# Altium PCB pix v2.4.8.PcbDoc (part 3 of 3)
Units mil, origin at the board's own origin, x right, y up, seen from the top; angles counter-clockwise.
Board outline 2756 x 1595 mil, 4 copper layers (Top, MidLayer1, MidLayer2, Bottom), stack 50.397 mil thick; 154 components, 289 nets, 731 pads, 438 vias.
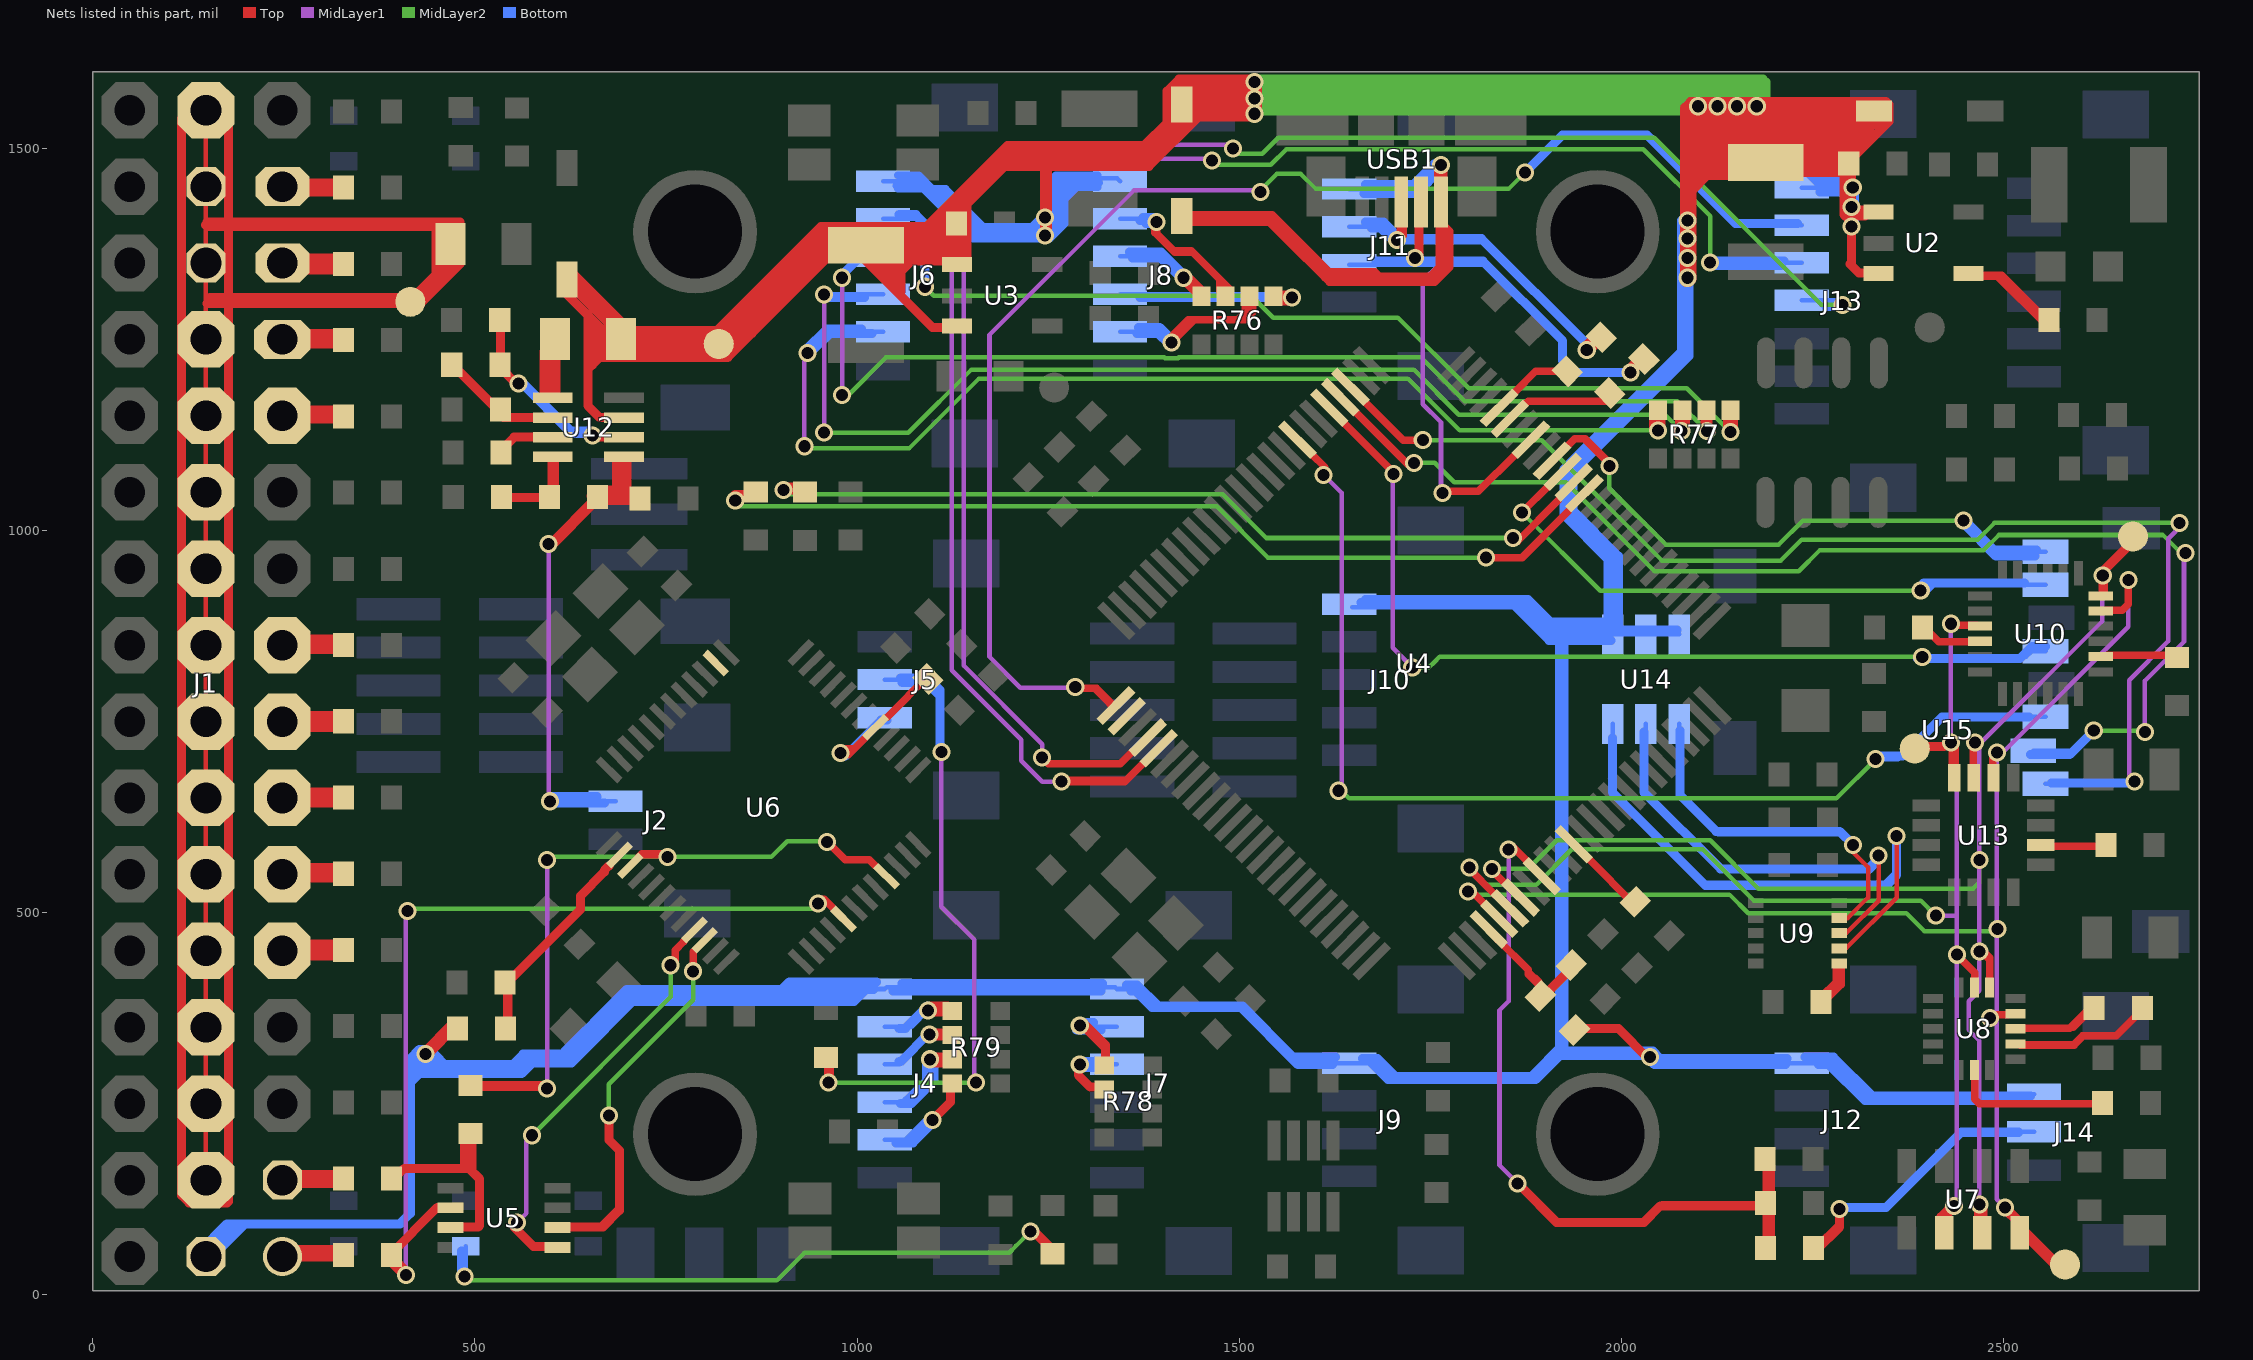
[diagram p5: the nets of this part, all layers, seen from the top]

## Via types
v1: diameter 23.62, hole 15.75, Top to Bottom, 438 vias

## Nets (pads, with @x,y where several pads share a name; then routed paths per layer and width w, separated by ;. In a path a pad name is that pad's centre, name@x,y a point inside that pad or via, vN(x,y) a via of type N, cw(c..) or ccw(c..) an arc to the next point about the centre after c; other vN are vias at no path point) (continued)
N$38: R33.1 R34.2 U5.3 | length 559.1
  Top w5.91: R33.1@390.83,151.84 402.37,163.39 490.16,163.39 ; U5.3@467.87,87.91 503.26,87.91 505.91,90.55 505.91,147.64 490.16,163.39 ; R34.2@490.16,206.93 490.16,163.39
  Top w11.81: R33.1@391.73,153.54 395.67,153.54 407.48,165.35 492.13,165.35 505.91,151.57 505.91,90.55 503.94,88.58 U5.3@478.35,88.58 ; 486.22,173.23 R34.2@486.22,202.76 ; 496.06,163.39 R34.2@496.06,212.6
N$39: 
N$40: LED3.C R9.1 | length 936.6
  Top w5.91: v1(1226.65,82.68) R9.1@1255.75,53.58
  Top w11.81: v1@1222.44,84.65 1230.31,84.65 R9.1@1261.81,53.15
  MidLayer2 w5.91: v1(486.22,23.62) 491.14,18.7 894.68,18.7 931.1,55.12 1199.09,55.12 1207.81,63.84 v1(1226.65,82.68)
  Bottom w5.91: v1(486.22,23.62) 488,25.4 LED3.C@488,63.47
  Bottom w11.81: v1@482.28,23.62 LED3.C@482.28,57.09
N$41: 
N$42: 
N$43: 
N$44: 
N$45: 
N$46: 
N$47: 
N$48: 
N$49: 
N$50: 
N$51: 
N$52: 
N$53: 
N$54: 
N$55: 
N$56: 
N$57: J5.2 R52.2 | length 1057.6
  Top w5.91: R52.2@959.49,310.3 959.49,280.67 v1(962.6,277.56)
  Top w9.84: v1@964.57,277.56 R52.2@964.57,301.18
  MidLayer1 w5.91: v1(1110.24,709.88) 1110.24,507.87 1153.54,464.57 1153.54,305.12 1153.54,275.59 v1(1155.51,277.56)
  MidLayer2 w5.91: v1(962.6,277.56) v1(1155.51,277.56)
  Bottom w5.91: J5.2@1036,805 1090.67,805 1110.24,785.43 v1(1110.24,709.88)
  Bottom w11.81: J5.2@1057.09,807.09 1092.52,807.09 1108.27,791.34 v1@1108.27,708.66 ; J5.2@1059.06,801.18 1090.55,801.18 1106.3,785.43
N$58: 
N$59: 
N$60: 
N$61: 
N$62: 
N$63: 
N$64: 
N$65: 
N$66: 
N$67: 
N$68: J1.34 R3.2 | length 173.7
  Top w5.91: J1.34@248.63,1149.37 R3.2@327.83,1149.37
  Top w11.81: J1.34@271.65,1145.67 R3.2@320.87,1145.67 ; J1.34@271.65,1157.48 R3.2@316.93,1157.48
N$69: 
N$70: 
N$71: J1.13 R40.2 | length 194.9
  Top w5.91: J1.13@249.1,451.1 R40.2@327.83,451.1
  Top w11.81: J1.13@257.87,458.66 R40.2@316.93,458.66 ; J1.13@265.75,442.91 R40.2@322.83,442.91
N$72: J1.16 R39.2 | length 171.5
  Top w5.91: J1.16@248.85,550.85 R39.2@327.83,550.85
  Top w11.81: J1.16@265.75,545.28 R39.2@318.9,545.28 ; J1.16@279.53,559.06 R39.2@318.9,559.06
N$73: J1.19 R36.2 | length 179.6
  Top w5.91: J1.19@248.61,650.61 R36.2@327.83,650.61
  Top w11.81: J1.19@273.62,643.7 R36.2@328.74,643.7 ; J1.19@273.62,657.48 R36.2@318.9,657.48
N$74: J1.22 R35.2 | length 187.7
  Top w5.91: J1.22@248.36,750.36 R35.2@327.83,750.36
  Top w11.81: J1.22@261.81,757.87 R35.2@318.9,757.87 ; J1.22@275.59,742.13 R35.2@326.77,742.13
N$75: J1.25 R48.2 | length 178.3
  Top w5.91: J1.25@248,850 248.11,850.11 R48.2@327.83,850.11
  Top w11.81: J1.25@271.65,858.27 R48.2@320.87,858.27 ; J1.25@281.5,844.49 R48.2@330.71,844.49
N$77: J1.37 R4.2 | length 183.3
  Top w5.91: J1.37@248.87,1249.13 R4.2@327.83,1249.13
  Top w11.81: J1.37@269.68,1257.87 R4.2@320.87,1257.87 ; J1.37@271.65,1244.09 R4.2@324.8,1244.09
N$78: J1.40 R5.2 | length 212.6
  Top w5.91: J1.40@249.12,1348.88 R5.2@327.83,1348.88
  Top w11.81: J1.40@234.25,1356.3 R5.2@320.87,1356.3 ; J1.40@267.72,1340.55 R5.2@314.96,1340.55
N$79: J1.43 R6.2 | length 192.6
  Top w5.91: J1.43@249.37,1448.63 R6.2@327.83,1448.63
  Top w11.81: J1.43@257.87,1454.72 R6.2@318.9,1454.72 ; J1.43@271.65,1442.91 R6.2@324.8,1442.91
N$80: 
N$81: 
N$82: 
N$83: 
N$84: 
N$85: 
N$86: 
N$87: 
N$88: 
N$89: 
N$90: 
N$91: 
N$92: 
N$93: 
N$94: 
N$95: 
N$96: 
N$97: 
N$98: 
N$99: J1.4 R33.2 | length 196.7
  Top w5.91: J1.4@248,150 325.99,150 R33.2@327.83,151.84
  Top w11.81: J1.4@261.81,157.48 R33.2@316.93,157.48 ; J1.4@263.78,145.67 R33.2@324.8,145.67
N$100: 
N$101: 
N$102: 
N$103: 
N$104: 
N$105: 
N$106: 
N$107: 
N$109: 
N$110: 
N$113: 
N$115: 
NewNet1: C36.2 J2.1 R62.2 U12.1 | length 1175.3
  Top w5.91: v1(596.46,982.28) 599.13,982.28 R62.2@660.51,1043.66 662.48,1041.69 C36.2@715.63,1041.69 ; 694.88,1043.17 694.95,1043.24 U12.1@694.95,1096.32
  Top w11.81: v1@596.46,984.25 600.39,984.25 R62.2@657.48,1041.34 ; v1@600.39,980.32 655.51,1035.43 R62.2@663.39,1035.43 ; R62.2@651.57,1045.28 C36.2@702.76,1045.28 ; R62.2@663.39,1039.37 C36.2@704.72,1039.37 ; R62.2@667.32,1053.15 694.88,1053.15 ; 685.04,1041.34 U12.1@685.04,1092.52 ; 694.88,1057.09 U12.1@694.88,1090.55 ; 698.82,1049.21 U12.1@698.82,1094.49
  MidLayer1 w5.91: v1@596.46,643.7 v1(596.46,982.28)
  Bottom w5.91: v1(598.3,645.67) 598.36,645.61 J2.1@684,645.61
  Bottom w11.81: v1@596.46,643.7 J2.1@669.29,643.7 ; v1@600.39,651.57 J2.1@659.45,651.57
NewNet2: C35.2 U10.20 | length 195.1
  Top w5.91: U10.20@2627.01,835.04 2688.97,835.04 ; 2700.71,835.04 2688.97,835.04 ; C35.2@2727.28,834.06 2726.3,835.04 2688.97,835.04
  Top w9.84: U10.20@2635.83,836.61 C35.2@2718.5,836.61
NewNet3: C37.1 U10.10 | length 150.8
  Top w5.91: C37.1@2394.29,872.95 2412.2,855.04 U10.10@2469.27,855.04
  Top w9.84: C37.1@2397.64,872.05 2415.35,854.33 U10.10@2458.66,854.33
NewNet4: C34.2 U13.14 | length 155.8
  Top w5.91: U13.14@2548.9,588.61 C34.2@2633.87,588.61
  Top w9.84: U13.14@2561.02,586.61 C34.2@2631.89,586.61
NewNet5: C29.1 U8.3 | length 215.1
  Top w5.91: U8.3@2515.87,348.03 2591.81,348.03 C29.1@2618.7,374.92
  Top w9.84: U8.3@2521.65,348.43 2586.61,348.43 C29.1@2612.2,374.02
NewNet6: C29.2 U8.2 | length 360.7
  Top w5.91: U8.2@2515.87,328.03 2589.84,328.03 2602.36,340.55 2647.32,340.55 C29.2@2681.69,374.92
  Top w9.84: U8.2@2521.65,326.77 2592.52,326.77 2604.33,338.58 2647.64,338.58 C29.2@2679.13,370.08
NewNet7: C30.1 U8.15 | length 382.7
  Top w5.91: U8.15@2462.6,293.36 2462.6,257.87 2469.41,251.06 C30.1@2617.52,251.06
  Top w9.84: U8.15@2462.6,283.46 2462.6,255.91 2468.5,250 C30.1@2622.05,250
NewNet8: C31.2 R59.1 U12.6 | length 308.2
  Top w5.91: R59.1@469.57,1216.89 474.76,1216.89 543.94,1147.71 U12.6@601.69,1147.71
  Top w11.81: R59.1@464.57,1222.44 C31.2@535.43,1151.57 ; C31.2@537.4,1147.64 U12.6@584.65,1147.64
NewNet9: L1.2 U12.5 | length 233.8
  Top w5.91: U12.5@601.69,1173.71 604.61,1176.62 L1.2@604.61,1250.75
  Top w11.81: U12.5@590.55,1179.13 L1.2@590.55,1234.25 ; 600.39,1183.07 L1.2@600.39,1234.25 ; U12.5@606.3,1177.17 L1.2@606.3,1226.38
NewNet10: 
NewNet11: R57.1 U9.6 | length 162.1
  Top w5.91: R57.1@2261.46,382.95 2285.02,406.52 U9.6@2285.02,433.22
  Top w9.84: R57.1@2261.81,389.76 2281.5,409.45 U9.6@2281.5,431.1 ; R57.1@2269.68,387.8 2287.4,405.51 U9.6@2287.4,433.07
NewNet12: R59.2 R60.1 U12.2 | length 487.9
  Top w5.91: R59.2@532.4,1217.05 R60.1@532.4,1275.24 ; R59.2@532.56,1216.89 v1(557.09,1192.36) ; v1(653.54,1124.02) 692.85,1124.02 U12.2@694.95,1121.91
  Top w11.81: R60.1@533.46,1271.65 533.46,1212.6 v1@553.15,1192.91 ; v1@655.51,1122.05 U12.2@671.26,1122.05
  Bottom w5.91: v1(557.09,1192.36) 625.43,1124.02 v1(653.54,1124.02)
  Bottom w11.81: v1@553.15,1194.88 561.02,1194.88 625.98,1129.92 v1@651.57,1129.92
NewNet13: R16.2 U12.7 | length 137.2
  Top w5.91: R16.2@533.94,1102.24 553.61,1121.91 U12.7@601.69,1121.91
  Top w11.81: R16.2@531.5,1102.36 551.18,1122.05 U12.7@584.65,1122.05
NewNet14: R61.2 R62.1 U12.8 | length 207.9
  Top w5.91: R61.2@534.53,1043.66 R62.1@597.52,1043.66 597.52,1092.15 U12.8@601.69,1096.32
  Top w11.81: R61.2@537.4,1043.31 R62.1@588.58,1043.31 ; R62.1@604.33,1055.12 U12.8@604.33,1094.49
NewNet15: U9.7 U14.C3 | length 1299.9
  Top w5.91: U9.7@2285.02,453.22 2294.05,453.22 2360.24,519.41 v1(2360.24,600.39)
  Bottom w5.91: U14.C3@1988.69,746.93 1988.69,656.98 2106.3,539.37 2344.49,539.37 2360.24,555.12 v1(2360.24,600.39)
  Bottom w11.81: U14.C3@1988.19,728.35 1988.19,657.48 2110.24,535.43 2346.46,535.43 2360.24,549.21 v1@2360.24,604.33
NewNet16: U9.8 U14.C2 | length 1004.7
  Top w5.91: U9.8@2285.02,473.22 2294.37,473.22 2336.61,515.47 v1(2336.61,574.8)
  Bottom w5.91: U14.C2@2032,746.93 2032,655.01 2126.97,560.04 2321.85,560.04 v1(2336.61,574.8) v1@2336.61,576.77
  Bottom w11.81: U14.C2@2029.53,736.22 2029.53,657.48 2129.92,557.09 2324.8,557.09 v1@2336.61,568.9
NewNet17: U9.9 U14.C1 | length 812
  Top w5.91: U9.9@2285.02,492.91 2296.06,492.91 2322.83,519.68 2322.83,559.35 2303.15,579.04 v1(2303.15,588.58)
  Bottom w5.91: U14.C1@2076,746.93 2076,652.35 2125.98,602.36 2289.37,602.36 v1(2303.15,588.58)
  Bottom w11.81: U14.C1@2076.77,738.19 2076.77,653.54 2124.02,606.3 2285.43,606.3 v1(2303.15,588.58)
NewNet200: C5.1 U2.4 | length 252.6
  Top w5.91: U2.4@2454.37,1336.02 2498.66,1336.02 C5.1@2559.33,1275.35
  Top w9.84: U2.4@2458.66,1332.68 2492.13,1332.68 C5.1@2555.12,1269.68
OTG_DM1: J11.3 R55.2 USB1.D- | length 1047.6
  Top w5.91: v1@1738,1356.49 USB1.D-@1738,1430 ; v1(2011.81,1206.69) R55.2@2029.53,1224.37
  Top w9.84: v1@1734.25,1358.27 USB1.D-@1734.25,1399.61 ; v1@2007.87,1210.63 2017.72,1220.47 R55.2@2017.72,1224.41 ; v1@2013.78,1206.69 2025.59,1218.5 R55.2@2031.5,1218.5
  Bottom w5.91: J11.3@1644,1348 1718.5,1348 ; v1@1738,1356.49 v1@1729.51,1348 ; v1(2011.81,1206.69) 1944.88,1206.69 1923.23,1228.35 1923.23,1251.97 1827.2,1348 v1@1729.51,1348 ; 1718.5,1348 v1@1729.51,1348 ; 1718.5,1348 v1@1729.51,1348
  Bottom w11.81: J11.3@1679.13,1352.36 1818.9,1352.36 1923.23,1248.03 1923.23,1222.44 1938.98,1206.69 v1@2007.87,1206.69
  other v1: 1730.13,1356.49
OTG_DP1: J11.2 R56.2 USB1.D+ | length 947.9
  Top w5.91: USB1.D+@1712,1430 1712,1376.58 v1@1712.6,1375.98 ; v1(1954.72,1236.22) 1971.19,1252.69 R56.2@1973.65,1252.69
  Top w9.84: v1@1710.63,1379.92 USB1.D+@1710.63,1397.64 ; v1@1710.63,1383.86 USB1.D+@1710.63,1403.54 ; v1@1714.57,1385.83 USB1.D+@1714.57,1397.64 ; v1@1952.76,1238.19 1952.76,1242.13 R56.2@1964.57,1253.94 ; v1(1954.72,1236.22) 1960.63,1236.22 R56.2@1968.5,1244.09
  Bottom w5.91: J11.2@1644,1397.61 1690.98,1397.61 1712.6,1375.98 1713.77,1377.16 1821.66,1377.16 1954.72,1244.09 v1(1954.72,1236.22)
  Bottom w11.81: J11.2@1665.35,1403.54 1688.98,1403.54 v1@1708.66,1383.86 ; J11.2@1673.23,1395.67 1685.04,1395.67 v1@1706.69,1374.02 ; v1@1714.57,1381.89 1816.93,1381.89 1956.69,1242.13 v1@1956.69,1238.19
  other v1: 1706.69,1379.92
OTG_FS_DM: R55.1 U4.70 | length 259
  Top w5.91: U4.70@1854.09,1146.32 1876.59,1168.82 1887.79,1168.82 1973.98,1168.82 R55.1@1984.98,1179.83
  Top w9.84: U4.70@1875.13,1166.47 1877.95,1169.29 R55.1@1988.19,1169.29
OTG_FS_DP: R56.1 U4.71 | length 182.3
  Top w5.91: U4.71@1839.95,1160.46 1887.63,1208.15 R56.1@1929.11,1208.15
  Top w9.84: U4.71@1861.09,1181.6 1888.15,1208.66 R56.1@1923.23,1208.66
PB2-BOOT1: R24.2 U4.37 | length 197.9
  Top w5.91: U4.37@1937.72,589.37 2012.86,514.24 R24.2@2018.24,514.24
  Top w9.84: U4.37@1956.69,570.87 R24.2@2017.72,509.84
PPM-SBUS-PROT: J1.1 R50.2 | length 200.8
  Top w5.91: J1.1@248,50 250.09,52.09 R50.2@327.83,52.09
  Top w11.81: J1.1@259.84,49.21 R50.2@324.8,49.21 ; J1.1@263.78,59.06 R50.2@318.9,59.06
PPM_INPUT: R50.1 U5.2 U6.29 | length 1380.7
  Top w5.91: v1(409.45,25.59) 390.83,44.21 R50.1@390.83,52.09 452.44,113.7 U5.2@467.87,113.7 ; v1(948.82,511.81) 961.99,511.81 967.21,506.58 ; 963.96,509.84 967.21,506.58 ; U6.29@982.33,491.47 967.21,506.58
  Top w9.84: v1@948.82,517.72 956.69,517.72 U6.29@968.5,505.91
  Top w11.81: R50.1@387.8,47.24 387.8,51.18 450.79,114.17 U5.2@456.69,114.17 ; R50.1@391.73,45.28 391.73,41.34 v1@407.48,25.59 ; R50.1@393.7,47.24 411.42,29.53 v1@411.42,25.59
  MidLayer1 w5.91: v1(409.45,25.59) 409.45,500 v1(411.42,501.97)
  MidLayer2 w5.91: v1(411.42,501.97) 414.37,504.92 851.38,504.92 941.93,504.92 v1(948.82,511.81)
PRESSURE_SENS: C11.2 R14.2 R15.2 U4.34 | length 1485.4
  Top w5.91: v1(1852.36,582.68) 1860.9,582.68 U4.34@1895.97,547.61 ; v1(1864.17,145.67) 1915.35,94.49 2027.56,94.49 2052.87,119.8 C11.2@2188.35,119.8 ; R14.2@2187.91,62.1 R15.2@2187.91,177.73
  Top w9.84: v1@1850.39,584.65 1858.93,584.65 U4.34@1875.98,567.59
  Top w11.81: v1@1868.11,149.61 1868.11,141.73 1915.35,94.49 2029.53,94.49 2051.18,116.14 C11.2@2190.94,116.14 ; R14.2@2194.88,62.99 R15.2@2194.88,175.2
  MidLayer1 w5.91: v1(1852.36,582.68) 1852.36,383.86 1840.55,372.05 1840.55,169.29 v1(1864.17,145.67)
PRESSURE_SENS_IN: J14.2 R14.1 | length 697.6
  Top w5.91: R14.1@2251.65,61.35 2285.43,95.13 v1(2285.43,112.2)
  Top w11.81: R14.1@2255.91,59.06 2285.43,88.58 v1(2285.43,112.2)
  Bottom w5.91: v1(2285.43,112.2) 2289.37,116.14 2344.49,116.14 2441.35,213 J14.2@2540,213
  Bottom w11.81: v1@2289.37,114.17 2346.46,114.17 2444.88,212.6 J14.2@2519.68,212.6
RGB_LED_3: 
RGB_LED_4: 
RGB_LED_14: 
RSSI_IN: R34.1 U6.15 U6.33 | length 1120.8
  Top w5.91: R34.1@498.03,269.68 v1(594.49,269.68) ; U6.15@703.1,561.4 715.71,574.01 v1@750.79,574.01 ; v1(960.63,592.52) 984.25,568.9 1016.92,568.9 U6.33@1038.34,547.48
  Top w9.84: U6.15@714.57,572.87 718.47,576.77 v1@751.97,576.77 ; v1@958.66,594.49 984.25,568.9 1015.75,568.9 U6.33@1023.62,561.02
  Top w11.81: R34.1@507.87,273.62 v1@590.55,273.62
  MidLayer1 w5.91: v1(594.49,269.68) v1(594.49,568.9)
  MidLayer2 w5.91: v1(594.49,568.9) 598.43,572.83 v1(751.97,572.83) 887.8,572.83 908.46,593.5 v1@959.65,593.5
SAFETY: J5.3 R54.1 U6.41 | length 448.5
  Top w5.91: v1(978.35,708.66) 990.22,708.66 U6.41@1024.17,742.61 1024.17,742.67 1060.04,778.54 1087.17,805.67 R54.1@1092.24,805.67
  Top w9.84: v1@978.35,706.69 988.19,706.69 U6.41@1011.81,730.32 ; v1@980.32,714.57 994.09,714.57 ; 1039.37,755.91 R54.1@1094.49,811.02
  Bottom w5.91: v1(978.35,708.66) 989.66,708.66 J5.3@1036,755
  Bottom w11.81: v1@976.38,704.72 984.25,704.72 1031.5,751.97 J5.3@1039.37,751.97
SBUS_INPUT: U5.6 U6.22 | length 729.8
  Top w5.91: U5.6@607.76,87.91 660.74,87.91 687.01,114.17 687.01,190.94 675.2,202.76 v1(675.2,234.25) ; v1(785.43,423.23) 785.43,448.72 U6.22@800.61,463.89
  Top w9.84: v1@785.43,425.2 785.43,448.72
  Top w11.81: U5.6@618.11,88.58 667.32,88.58 688.98,110.24 688.98,188.98 675.2,202.76 v1@675.2,232.28
  MidLayer2 w5.91: v1(675.2,234.25) 675.2,275.59 785.43,385.83 v1(785.43,423.23)
  Bottom w5.91: v1@785.43,421.26 v1(785.43,423.23)
SBUS_OUTPUT: U5.5 U6.21 | length 653
  Top w5.91: v1(555.12,94.49) 555.12,82.68 575.89,61.91 U5.5@607.76,61.91 ; v1(755.9,431.1) 759.84,435.04 759.84,449.99 U6.21@787.17,477.32
  Top w9.84: v1@761.81,431.1 761.81,450.79 772.83,461.8
  Top w11.81: v1@551.18,96.46 551.18,88.58 576.77,62.99 U5.5@598.43,62.99
  MidLayer1 w5.91: v1(555.12,94.49) 566.93,106.3 566.93,192.91 566.93,200.79 v1(574.8,208.66)
  MidLayer2 w5.91: v1(574.8,208.66) 755.9,389.76 755.9,393.7 v1(755.9,431.1)
SDIO_CK: U4.80 U15.5 | length 1502.6
  Top w5.91: U4.80@1617.92,1160.46 1700.79,1077.59 1700.79,1074.8 v1(1701.92,1073.67)
  Top w9.84: U4.80@1635.83,1141.73 v1@1700.79,1076.77
  MidLayer1 w5.91: 1700.79,860.24 1700.79,870.08 ; v1(1701.92,1073.67) 1700.79,1074.8 1700.79,933.07 1700.79,870.08 ; v1(1726.38,820.87) 1700.79,846.46 1700.79,870.08
  MidLayer2 w5.91: v1(1726.38,820.87) 1748.33,820.87 1755.07,827.6 1762.11,834.65 1866.14,834.65 v1(2393.7,834.65) v1@2395.67,834.65
  Bottom w5.91: v1(2393.7,834.65) 2529.53,834.65 2536.88,842 U15.5@2555,842
  Bottom w11.81: v1@2387.8,832.68 2521.65,832.68 2537.4,848.43 U15.5@2555.12,848.43
SDIO_CMD: U4.83 U15.3 | length 1709.3
  Top w5.91: U4.83@1576.2,1118.74 1610.24,1084.7 v1(1610.24,1072.83)
  Top w9.84: U4.83@1594.49,1100.39 1612.2,1082.68 v1@1612.2,1078.74
  MidLayer1 w5.91: v1(1610.24,1072.83) 1633.86,1049.21 1633.86,659.45 v1(1629.92,659.45)
  MidLayer2 w5.91: v1(1629.92,659.45) 1633.86,659.45 1643.7,649.61 2281.5,649.61 v1(2332.68,700.79)
  Bottom w5.91: v1(2332.68,700.79) 2362.2,700.79 2417.42,756 U15.3@2555,756
  Bottom w11.81: v1@2334.65,704.72 2368.11,704.72 2419.29,755.91 U15.3@2533.46,755.91
SDIO_D0: U4.65 U15.7 | length 1022.8
  Top w5.91: v1(1870.08,1023.62) 1870.08,1023.71 U4.65@1923.39,1077.02
  Top w9.84: v1@1866.14,1023.62 1869.99,1023.62 U4.65@1905.42,1059.06
  MidLayer2 w5.91: v1(1870.08,1023.62) 1972.44,921.26 2372.04,921.26 v1(2391.73,921.26)
  Bottom w5.91: v1(2391.73,921.26) 2399.47,929 U15.7@2555,929
  Bottom w11.81: v1@2387.8,923.23 2395.67,931.1 U15.7@2527.56,931.1 ; v1@2389.76,919.29 2395.67,919.29 2405.51,929.13
SDIO_D1: U4.66 U15.8 | length 1062.3
  Top w5.91: U4.66@1909.25,1091.16 1938.16,1120.08 1948.82,1120.08 v1(1984.25,1084.65)
  Top w9.84: U4.66@1929.13,1110.24 1938.98,1120.08 1952.76,1120.08 v1@1986.22,1086.61
  MidLayer2 w5.91: v1(1984.25,1084.65) 1984.25,1055.41 2058.37,981.3 2205.71,981.3 2237.2,1012.8 v1(2447.83,1012.8)
  Bottom w5.91: v1@2444.88,1009.84 2448.82,1009.84 2486.66,972 U15.8@2555,972
  Bottom w11.81: v1@2446.85,1015.75 2488.19,974.41 U15.8@2543.31,974.41 ; v1@2448.82,1007.87 2490.16,966.54 U15.8@2541.34,966.54
SDIO_D2: U4.78 U15.1 | length 1888
  Top w5.91: U4.78@1645.49,1188.04 1645.49,1187.48 1714.86,1118.11 v1(1740.16,1118.11)
  Top w9.84: U4.78@1665.35,1167.32 1714.57,1118.11 v1(1740.16,1118.11)
  MidLayer1 w5.91: v1(2671.26,671.26) 2664.37,678.15 2664.37,804.13 2715.55,855.32 2715.55,989.17 v1@2736.22,1009.84
  MidLayer2 w5.91: v1(1740.16,1118.11) 1895.67,1118.11 2053.15,960.63 2208.66,960.63 2236.22,988.19 2466.54,988.19 2488.19,1009.84 v1@2736.22,1009.84
  Bottom w5.91: U15.1@2555,668.62 v1@2668.62,668.62
  Bottom w11.81: U15.1@2562.99,669.29 v1@2665.35,669.29
  other v1: 2730.32,1009.84
SDIO_D3: U4.79 U15.2 | length 1838.9
  Top w5.91: U4.79@1632.06,1174.6 1718.08,1088.58 v1(1728.77,1088.58)
  Top w9.84: U4.79@1649.61,1157.48 v1@1720.47,1086.61
  MidLayer1 w5.91: v1(2685.04,736.22) 2685.04,803.15 2736.22,854.33 v1@2736.22,968.5
  MidLayer2 w5.91: v1(1728.77,1088.58) 1755.91,1088.58 1781.5,1062.99 1927.17,1062.99 2043.31,946.85 2232.28,946.85 2259.84,974.41 2474.41,974.41 2494.09,994.09 2708.66,994.09 2732.28,970.47 v1(2738.19,970.47) ; v1(2618.11,738.19) v1@2685.04,738.19
  Bottom w5.91: U15.2@2539,711.93 2591.85,711.93 v1(2618.11,738.19)
  Bottom w11.81: U15.2@2535.43,706.69 2586.61,706.69 v1@2620.08,740.16
SERIAL1_CTS: J8.4 R76.5 | length 483.3
  Top w5.91: R76.5@1544.9,1306.38 1567.64,1306.38 v1(1568.9,1305.12)
  Top w9.84: R76.5@1551.18,1299.21 v1@1566.93,1299.21 ; R76.5@1551.18,1309.06 v1@1570.87,1309.06
  Bottom w5.91: J8.4@1344,1309 1565.02,1309 v1(1568.9,1305.12)
  Bottom w11.81: J8.4@1370.08,1305.12 v1@1566.93,1305.12
SERIAL1_RTS: J8.5 R76.6 | length 565.9
  Top w5.91: v1(1411.42,1246.06) 1411.42,1255.91 1429.13,1273.62 1501.97,1273.62 1513.41,1285.06 R76.6@1513.41,1306.38
  Top w9.84: v1@1405.51,1246.06 1405.51,1248.03 1433.07,1275.59 1474.41,1275.59 ; v1(1411.42,1246.06) 1440.94,1275.59 1507.87,1275.59 1517.72,1285.43 R76.6@1517.72,1305.12 ; 1500,1277.56 1507.87,1285.43 R76.6@1507.87,1303.15
  Bottom w5.91: J8.5@1344,1260 1397.48,1260 v1(1411.42,1246.06)
  Bottom w11.81: J8.5@1366.14,1257.87 1393.7,1257.87 v1@1407.48,1244.09 ; J8.5@1368.11,1265.75 1395.67,1265.75 v1@1409.45,1251.97
SERIAL1_RX: J8.3 R76.8 | length 348.4
  Top w5.91: v1(1427.17,1330.71) 1427.17,1329.63 R76.8@1450.41,1306.38
  Top w9.84: v1@1425.2,1330.71 1435.04,1330.71 R76.8@1452.76,1312.99 ; v1(1427.17,1330.71) 1427.17,1326.77 R76.8@1444.88,1309.06
  Bottom w5.91: J8.3@1344,1358.61 1399.27,1358.61 v1(1427.17,1330.71)
  Bottom w11.81: J8.3@1356.3,1364.17 1397.64,1364.17 v1@1427.17,1334.65 ; J8.3@1360.24,1356.3 1397.64,1356.3 1421.26,1332.68 v1@1423.23,1332.68
SERIAL1_TX: J8.2 R76.7 | length 445.8
  Top w5.91: v1(1391.73,1403.54) 1393.7,1401.57 1393.7,1389.76 1415.35,1368.11 1433.07,1368.11 1481.91,1319.27 R76.7@1481.91,1306.38
  Top w9.84: v1@1389.76,1407.48 1389.76,1389.76 1415.35,1364.17 1438.98,1364.17 R76.7@1488.19,1314.96 ; 1433.07,1366.14 1437.01,1366.14 1458.66,1344.49 ; R76.7@1474.41,1312.99 1474.41,1324.8
  Bottom w5.91: J8.2@1344,1407.82 1387.45,1407.82 v1(1391.73,1403.54) 1393.7,1405.51 v1@1395.67,1405.51
  Bottom w11.81: J8.2@1370.08,1405.51 v1@1391.73,1405.51 ; J8.2@1374.02,1409.45 v1@1391.73,1409.45 ; J8.2@1377.95,1401.57 v1@1391.73,1401.57
SERIAL2_CTS: J6.4 R77.7 | length 1582.1
  Top w5.91: v1(2078.74,1129.92) 2079.73,1130.91 R77.7@2079.73,1157.15
  Top w9.84: v1@2074.8,1129.92 R77.7@2074.8,1151.57 ; v1@2078.74,1127.95 R77.7@2078.74,1145.67 ; v1@2084.65,1133.86 R77.7@2084.65,1149.61
  MidLayer1 w5.91: v1(956.69,1127.95) v1(956.69,1309.06)
  MidLayer2 w5.91: v1(956.69,1127.95) 1066.93,1127.95 1149.61,1210.63 1728.35,1210.63 1787.39,1151.58 2000,1151.58 2057.08,1151.58 v1(2078.74,1129.92)
  Bottom w5.91: v1(956.69,1309.06) 956.75,1309 J6.4@1034,1309
  Bottom w11.81: v1@958.66,1305.12 J6.4@1009.84,1305.12
SERIAL2_RTS: J6.5 R77.8 | length 1662.8
  Top w5.91: v1(2048.24,1130.91) R77.8@2048.24,1157.15
  Top w9.84: v1@2041.34,1131.89 R77.8@2041.34,1145.67 ; v1@2053.15,1135.83 R77.8@2053.15,1145.67
  MidLayer1 w5.91: v1(931.1,1110.23) 931.1,1228.34 v1(935.04,1232.28)
  MidLayer2 w5.91: v1(931.1,1110.23) 934.05,1107.28 1067.91,1107.28 1159.45,1198.82 1255.9,1198.82 ; 1238.19,1198.82 1255.9,1198.82 ; v1(2048.24,1130.91) 2017.71,1130.91 1788.38,1130.91 1720.47,1198.82 1255.9,1198.82
  Bottom w5.91: v1(935.04,1232.28) 962.76,1260 J6.5@1034,1260
  Bottom w11.81: v1@933.07,1236.22 960.63,1263.78 J6.5@1005.91,1263.78 ; v1@937.01,1234.25 940.94,1234.25 964.57,1257.87 J6.5@1019.68,1257.87
SERIAL2_RX: J6.3 R77.6 | length 1519
  Top w5.91: R77.6@2111.23,1157.15 2111.23,1130.9 v1(2112.2,1129.92)
  Top w9.84: v1@2108.27,1131.89 R77.6@2108.27,1147.64 ; v1@2114.17,1129.92 R77.6@2114.17,1145.67
  MidLayer1 w5.91: v1(980.32,1177.17) v1(980.32,1330.71)
  MidLayer2 w5.91: v1(980.32,1177.17) 988.19,1177.17 1037.4,1226.38 1401.87,1226.38 1402.86,1225.39 1419.98,1225.39 1420.96,1226.38 1738.19,1226.38 1795.28,1169.29 2072.83,1169.29 v1(2112.2,1129.92)
  Bottom w5.91: v1(980.32,1330.71) 1005.91,1356.3 1031.69,1356.3 J6.3@1034,1358.61
  Bottom w11.81: v1@980.32,1334.65 1005.91,1360.24 J6.3@1017.72,1360.24
SERIAL2_TX: J6.2 R77.5 | length 1446.8
  Top w5.91: v1(2142.71,1128.95) R77.5@2142.73,1157.15
  Top w9.84: v1@2137.8,1133.86 R77.5@2137.8,1149.61 ; v1@2147.64,1129.92 R77.5@2147.64,1147.64
  MidLayer2 w5.91: v1(1088.58,1318.89) 1100.39,1307.08 1515.75,1307.08 1544.29,1278.54 1707.68,1278.54 1800.2,1186.02 2085.63,1186.02 v1(2142.71,1128.95)
  Bottom w5.91: J6.2@1034,1407.82 1076.43,1407.82 1090.55,1393.7 v1@1090.55,1320.87
  Bottom w11.81: J6.2@1055.12,1413.39 1076.77,1413.39 1088.58,1401.57 v1@1088.58,1322.83
SERIAL3_RX: J7.3 R78.6 | length 201.6
  Top w5.91: v1(1291.34,301.18) 1291.34,281.5 1304.12,268.71 R78.6@1323.16,268.71
  Top w11.81: v1@1289.37,297.24 1289.37,287.4 1305.12,271.65 R78.6@1320.87,271.65
  Bottom w5.91: v1(1291.34,301.18) 1290.91,301.61 J7.3@1340,301.61
  Bottom w11.81: v1@1289.37,297.24 J7.3@1316.93,297.24 ; v1@1293.31,305.12 J7.3@1312.99,305.12
SERIAL3_TX: J7.2 R78.5 | length 233.2
  Top w5.91: v1(1291.34,352.36) 1323.16,320.54 R78.5@1323.16,300.21
  Top w11.81: v1@1295.28,356.3 1324.8,326.77 R78.5@1324.8,301.18
  Bottom w5.91: v1(1291.34,352.36) 1292.88,350.82 J7.2@1340,350.82
  Bottom w11.81: v1@1287.4,346.46 J7.2@1318.9,346.46 ; v1@1289.37,356.3 J7.2@1309.06,356.3
SERIAL4_RX: J4.3 R79.6 | length 207
  Top w5.91: v1(1094.51,340.55) 1095.48,339.58 R79.6@1124.34,339.58
  Top w11.81: v1@1094.49,342.52 R79.6@1116.14,342.52 ; v1@1098.43,338.58 R79.6@1124.02,338.58
  Bottom w5.91: J4.3@1036,301.61 1055.56,301.61 v1(1094.51,340.55)
  Bottom w11.81: J4.3@1055.12,305.12 1057.09,305.12 v1@1094.49,342.52
SERIAL4_TX: J4.2 R79.5 | length 198.4
  Top w5.91: v1(1092.52,372.05) 1093.49,371.07 R79.5@1124.34,371.07
  Top w11.81: v1@1090.55,370.08 R79.5@1118.11,370.08 ; v1@1094.49,377.95 R79.5@1118.11,377.95
  Bottom w5.91: J4.2@1036,350.82 1071.29,350.82 v1(1092.52,372.05)
  Bottom w11.81: J4.2@1055.12,348.43 1062.99,348.43 v1@1092.52,377.95
SERIAL5_RX: J4.5 R79.8 | length 297
  Top w5.91: v1(1098.43,228.35) 1124.34,254.27 R79.8@1124.34,276.58
  Top w11.81: v1@1098.54,228.48 1122.05,251.98 R79.8@1122.05,277.56
  Bottom w5.91: J4.5@1036,203 1073.08,203 v1(1098.43,228.35)
  Bottom w11.81: J4.5@1051.18,198.82 1072.83,198.82 v1@1100.39,226.38 ; J4.5@1064.96,200.79 1094.49,230.32 v1@1098.43,230.32
SERIAL5_TX: J4.4 R79.7 | length 325.1
  Top w5.91: v1(1095.48,308.08) R79.7@1124.34,308.08
  Top w11.81: v1@1094.49,303.15 R79.7@1124.02,303.15 ; v1@1094.49,311.02 R79.7@1118.11,311.02
  Bottom w5.91: J4.4@1036,252 1059.09,252 1095.48,288.4 v1(1095.48,308.08)
  Bottom w11.81: J4.4@1057.09,250 1070.87,250 1100.39,279.53 v1@1100.39,307.09 ; J4.4@1064.96,253.94 1090.55,279.53 v1@1090.55,309.06
SERIAL_FMU_TO_IO: R46.1 U4.63 | length 1360.7
  Top w5.91: v1@840.55,1035.43 855.73,1050.61 R46.1@871.32,1050.61 ; v1(1822.83,964.57) 1823.14,964.87 1867.81,964.87 U4.63@1951.67,1048.74
  Top w9.84: v1(1822.83,964.57) 1870.08,964.57 1930.41,1024.9
  Top w11.81: v1@840.55,1047.24 R46.1@856.3,1047.24
  MidLayer2 w5.91: v1@840.55,1035.43 844.49,1031.5 1470.47,1031.5 1537.4,964.57 1807.08,964.57 v1(1822.83,964.57)
  other v1: 840.55,1039.37
SERIAL_IO_TO_FMU: R47.1 U4.64 | length 1219
  Top w5.91: v1(903.54,1053.15) 906.57,1050.12 R47.1@931.69,1050.12 ; v1(1858.27,990.16) 1865.84,990.16 1937.53,1061.84 U4.64@1937.53,1062.88
  Top w9.84: v1@1858.27,986.22 1864.17,986.22 1917.32,1039.37
  Top w11.81: v1@907.48,1057.09 915.35,1057.09
  MidLayer1 w5.91: v1@901.57,1053.15 v1@905.51,1049.21
  MidLayer2 w5.91: v1@905.51,1049.21 903.54,1049.21 901.57,1047.24 1478.35,1047.24 1535.43,990.16 1679.13,990.16 v1(1858.27,990.16)
SPI_EXT_MISO: J13.3 U4.4 | length 2469.3
  Top w5.91: v1(1242.13,702.76) 1250.98,693.9 1345.1,693.9 U4.4@1380.36,729.15
  Top w9.84: v1@1240.16,698.82 1246.06,698.82 1250,694.88 1344.49,694.88 U4.4@1360.24,710.63
  MidLayer1 w5.91: v1(1242.13,702.76) 1242.13,720.47 1139.76,822.83 1139.76,1423.65 1202.33,1486.22 1442.91,1486.22 ; 1448.82,1486.22 1442.91,1486.22 ; v1@1458.66,1484.25 v1(1464.57,1484.25) ; v1@1462.6,1486.22 1442.91,1486.22
  MidLayer2 w5.91: v1(1464.57,1484.25) 1470.47,1478.35 1541.34,1478.35 1561.79,1498.8 2028.76,1498.8 2116.14,1411.42 v1(2116.14,1350.39)
  Bottom w5.91: v1(2116.14,1350.39) 2116.32,1350.21 J13.3@2236,1350.21
  Bottom w11.81: v1@2118.11,1352.36 J13.3@2212.6,1352.36 ; v1@2122.05,1346.46 J13.3@2208.66,1346.46
SPI_EXT_MOSI: J13.4 U4.5 | length 2463.5
  Top w5.91: v1@1267.72,675.2 1354.68,675.2 U4.5@1394.5,715.01
  Top w9.84: v1@1265.75,671.26 1350.39,671.26 U4.5@1374.02,694.88
  MidLayer1 w5.91: v1(1267.72,671.26) 1242.13,671.26 1214.57,698.82 1214.57,726.38 1124.02,816.93 1124.02,1427.17 1201.77,1504.92 1497.05,1504.92 v1@1498.03,1503.94
  MidLayer2 w5.91: v1(1492.13,1500) 1499.02,1493.11 1530.22,1493.11 1550.88,1513.78 2043.31,1513.78 2261.81,1295.28 v1(2289.37,1295.28)
  Bottom w5.91: J13.4@2236,1301 2289.55,1301 v1@2291.34,1299.21
  Bottom w11.81: J13.4@2267.72,1293.31 2277.56,1293.31
SPI_EXT_SCK: J13.2 U4.1 | length 2325.7
  Top w5.91: v1(1285.43,795.28) 1314.24,795.28 U4.1@1338.64,770.87
  Top w9.84: v1@1287.4,793.31 1311.02,793.31 1330.71,773.62
  MidLayer1 w5.91: v1@1284.45,794.29 1213.52,794.29 1173.23,834.59 1173.23,1255.9 1362.21,1444.88 1527.56,1444.88 v1@1531.5,1444.88
  MidLayer2 w5.91: v1@1529.53,1446.85 1549.21,1466.54 1580.71,1466.54 1600.39,1446.85 1852.36,1446.85 v1(1874.02,1468.5)
  Bottom w5.91: v1(1874.02,1468.5) 1923.23,1517.72 2035.43,1517.72 2153.72,1399.43 J13.2@2236,1399.43
  Bottom w11.81: v1@1875.98,1468.5 1875.98,1470.47 1923.23,1517.72 2033.46,1517.72 2149.61,1401.57 J13.2@2230.32,1401.57
  other v1: 1527.56,1442.91
SPI_INT_MISO: pad.0@2383.86,714.57 U4.31 U7.6 U8.7 U10.9 U13.4 | length 2027.9
  Top w5.91: v1(1801.18,559.05) 1801.18,555.12 1803.55,555.12 1852.82,505.85 U4.31@1854.21,505.85 ; pad.0@2383.86,714.57 v1@2423.23,714.57 ; U7.6@2422.48,81.12 2422.48,103.58 v1(2435.04,116.14) ; v1(2431.1,722.44) 2435.51,718.03 U13.4@2435.51,676.42 ; v1(2431.1,877.95) 2434.17,874.88 U10.9@2469.27,874.88 ; v1(2438.98,444.88) 2461.93,421.93 U8.7@2461.93,401.97
  Top w9.84: v1(1801.18,559.05) 1801.18,557.09 U4.31@1834.65,523.62 ; pad.0@2393.7,718.5 v1@2423.23,718.5 ; U7.6@2417.32,92.52 2417.32,102.36 v1@2435.04,120.08 ; U7.6@2423.23,100.39 v1@2435.04,112.2 ; v1@2431.1,875.98 U10.9@2464.57,875.98 ; U13.4@2433.07,687.01 v1@2433.07,722.44 ; 2437.01,694.88 v1@2437.01,718.5 ; v1@2440.94,442.91 2462.6,421.26 U8.7@2462.6,411.42
  MidLayer1 w5.91: v1(2411.41,496.06) 2438.98,496.06 ; v1(2431.1,877.95) v1(2431.1,722.44) 2438.98,714.57 2438.98,496.06 ; v1(2435.04,116.14) 2438.98,120.08 v1(2438.98,444.88) 2438.98,496.06
  MidLayer2 w5.91: v1@1801.18,557.49 1821.86,536.81 ; 1822.15,536.52 1888.88,536.52 1935.04,582.68 2106.3,582.68 2173.23,515.75 2391.73,515.75 v1(2411.41,496.06)
SPI_INT_MOSI: pad.0@2669.29,992.13 U4.32 U7.7 U8.6 U10.24 U13.3 | length 2139.7
  Top w5.91: v1(1830.71,557.19) U4.32@1868.13,519.77 ; U13.3@2461.1,676.42 v1@2461.1,720.94 ; v1(2468.5,118.11) 2472.09,114.53 U7.7@2472.09,81.12 ; v1(2468.5,448.82) 2481.61,435.71 U8.6@2481.61,401.97 ; U10.24@2627.01,914.25 2627.01,938.03 v1(2629.92,940.94) 2629.92,950.79 pad.0@2675.2,996.06
  Top w9.84: v1@1828.74,557.09 U4.32@1849.95,535.88 ; U13.3@2460.63,688.98 v1@2460.63,720.47 ; U7.7@2466.54,90.55 v1@2466.54,114.17 ; v1@2470.47,452.76 2482.28,440.94 U8.6@2482.28,411.42 ; U7.7@2474.41,100.39 v1@2474.41,118.11 ; U10.24@2631.89,915.35 2631.89,946.85 pad.0@2669.29,984.25
  MidLayer1 w5.91: v1(2462.6,722.44) 2470.47,722.44 2628.93,880.9 2628.93,939.96 v1(2629.92,940.94) ; v1(2468.5,118.11) 2468.5,332.68 2454.72,346.46 2454.72,383.86 2468.5,397.64 v1(2468.5,448.82) v1(2468.5,568.9) v1@2468.5,716.54
  MidLayer2 w5.91: v1(1830.71,557.19) 1878.06,557.19 1915.35,594.49 2116.14,594.49 2179.13,531.5 2460.63,531.5 2468.5,539.37 v1(2468.5,568.9)
  Bottom w5.91: v1(1830.71,557.19) v1@1830.71,559.06
SPI_INT_SCK: pad.0@2580.71,39.37 U4.30 U7.8 U8.4 U10.23 U13.2 | length 2202.8
  Top w5.91: v1(1799.21,527.56) 1804.66,527.56 U4.30@1840.29,491.93 ; v1(2482.28,362.2) 2487.8,367.72 U8.4@2515.87,367.72 ; U13.2@2486.9,676.42 2486.9,704.98 v1(2491.28,709.37) ; v1(2501.97,114.17) 2521.09,95.05 U7.8@2521.09,81.12 2566.77,35.43 pad.0@2574.8,35.43 ; U10.23@2627.76,893.82 U10.23@2627.01,894.57 2654.29,894.57 2663.39,903.66 v1(2663.39,935.04)
  Top w9.84: v1(1799.21,527.56) 1804.66,527.56 U4.30@1820.41,511.81 ; v1@2486.22,366.14 U8.4@2505.91,366.14 ; U13.2@2486.22,688.98 v1@2486.22,712.6 ; v1@2501.97,112.2 2501.97,110.24 U7.8@2517.72,94.49 ; v1@2503.94,116.14 2503.94,114.17 U7.8@2523.62,94.49 ; U7.8@2519.68,88.58 2523.62,88.58 pad.0@2572.83,39.37 ; U10.23@2633.86,895.67 2655.51,895.67 2663.39,903.54 v1@2663.39,933.07
  MidLayer1 w5.91: v1(2482.28,362.2) 2491.28,371.2 ; v1@2491.28,478.35 v1(2491.28,709.37) ; v1@2491.28,710.63 2500,710.63 2663.39,874.02 v1(2663.39,935.04) ; v1(2492.13,478.35) 2492.13,469.35 2491.28,468.5 2491.28,371.2 ; v1(2501.97,114.17) 2491.28,124.86 2491.28,371.2
  MidLayer2 w5.91: v1(1799.21,527.56) 1803.15,523.62 2141.44,523.62 2166.04,499.02 2373.03,499.02 2396.65,475.39 2489.17,475.39 v1(2492.13,478.35)
USB-5V: D2.1 J11.1 U4.68 USB1.VBUS | length 2842.8
  Top w5.91: D2.1@1424.76,1411.65 1541.1,1411.65 1618.11,1334.65 1750,1334.65 1764,1348.65 USB1.VBUS@1764,1430 v1(1764,1478.13) ; v1@1765.74,1047.25 v1(1765.74,1049.21) 1812.14,1049.21 U4.68@1881.67,1118.74
  Top w9.84: D2.1@1429.13,1403.54 1537.4,1403.54 ; D2.1@1431.1,1411.42 1531.5,1411.42 1612.2,1330.71 1748.03,1330.71 1767.72,1350.39 USB1.VBUS@1767.72,1405.51 ; D2.1@1435.04,1413.39 1543.31,1413.39 1618.11,1338.58 1677.17,1338.58 1681.1,1334.65 ; 1559.06,1395.67 1559.06,1383.86 1618.11,1324.8 1755.91,1324.8 1775.59,1344.49 1775.59,1391.73 USB1.VBUS@1769.68,1397.64 ; USB1.VBUS@1759.84,1460.63 v1@1759.84,1476.38 ; 1761.81,1336.61 USB1.VBUS@1761.81,1403.54 ; v1@1767.72,1051.18 1812.99,1051.18 U4.68@1862.2,1100.39 ; USB1.VBUS@1767.72,1427.17 v1@1767.72,1480.32
  MidLayer1 w5.91: v1(1764,1478.13) 1760.83,1474.95 1760.83,1347.44 1740.16,1326.77 1740.16,1165.35 1764,1141.51 1764,1088.58 1764,1047.02 1765.74,1048.77 v1(1765.74,1049.21)
  Bottom w5.91: J11.1@1644,1446.82 1732.69,1446.82 v1(1764,1478.13)
  Bottom w11.81: J11.1@1663.39,1440.94 1732.28,1440.94 v1@1763.78,1472.44 ; J11.1@1665.35,1452.76 1728.35,1452.76 v1@1755.91,1480.32
VBAT: 
VBUS: 
VDD_3V3_SENSORS: 
VDD_3V3_SENSORS_EN: U4.2
VDD_3V3_SPEKTRUM: 
VDD_3V3_SPEKTRUM_EN: U6.2
VDD_5V_BRICK: 
VDD_5V_HIPOWER: 
VDD_5V_IN: C1.2 C9.1 C43.1 C44.1 D2.2 D3.2 D5.2 J1.2 J4.1 J6.1 J7.1 J8.1 J9.1 J10.1 J12.1 J13.1 J14.1 L1.1 pad.0@818.9,1244.09 R30.2 R43.1 U2.1 U2.3 U3.1 U3.3 U12.3 U14.A1 U14.A2 U14.A3 | length 32632.1
  Top w5.91: v1(435.04,314.96) 468.7,348.62 R43.1@476.82,348.62 ; D3.2@620.51,1328.5 620.51,1321.46 L1.1@691.22,1250.75 ; U12.3@694.95,1147.71 659.38,1147.71 647.64,1159.45 647.64,1207.17 L1.1@691.22,1250.75 ; C43.1@981.61,1373.35 859.02,1250.75 L1.1@691.22,1250.75 ; U3.1@1130.04,1348.82 1130.04,1370.08 ; U3.3@1130.63,1267.52 1100.59,1267.52 1011.61,1356.5 C43.1@1011.61,1373.35 1014.88,1370.08 1130.04,1370.08 ; D2.2@1424.76,1540.91 1368.11,1484.25 1346.45,1484.25 1190.95,1484.25 1130.04,1423.35 C9.1@1130.04,1401.57 1130.04,1370.08 ; D2.2@1424.76,1557.32 1513.54,1557.32 1521.65,1549.22 v1@1521.65,1553.15 ; R30.2@1938.62,346.32 2002.1,346.32 v1(2037.4,311.02) ; v1@2086.61,1387.8 2086.61,1543.31 2098.43,1555.12 v1(2177.17,1555.12) ; C44.1@2188.78,1481.61 2188.78,1543.5 v1(2177.17,1555.12) ; 2297.56,1553.46 C1.2@2297.56,1479.92 2297.56,1455.43 v1@2303.48,1449.51 ; v1(2302.79,1448.82) v1@2302.79,1416.73 ; D5.2@2324.13,1555.12 v1(2177.17,1555.12) ; U2.3@2336.26,1336.02 2313.58,1336.02 2302.79,1346.82 v1@2302.79,1416.73 ; U2.1@2336.26,1416.73 v1@2302.79,1416.73
  Top w9.84: v1@1244.09,1387.8 1244.09,1474.41 ; v1@1250,1383.86 1250,1478.35
  Top w11.81: v1@431.1,314.96 472.44,356.3 R43.1@474.41,356.3 ; v1@435.04,312.99 437.01,312.99 R43.1@476.38,352.36 ; D3.2@620.08,1320.87 620.08,1309.06 L1.1@677.17,1251.97 ; D3.2@624.02,1330.71 624.02,1324.8 L1.1@681.1,1267.72 ; D3.2@625.98,1344.49 625.98,1338.58 L1.1@688.98,1275.59 ; 647.64,1283.46 647.64,1163.39 663.39,1147.64 U12.3@677.17,1147.64 ; 651.57,1226.38 L1.1@679.13,1226.38 ; 653.54,1216.54 653.54,1259.84 659.45,1265.75 ; 657.48,1232.28 657.48,1265.75 ; 669.29,1232.28 669.29,1263.78 ; L1.1@675.2,1226.38 830.71,1226.38 862.2,1257.87 ; L1.1@698.82,1261.81 816.93,1261.81 952.76,1397.64 C9.1@1118.11,1397.64 ; L1.1@700.79,1240.16 818.9,1240.16 960.63,1381.89 ; L1.1@704.72,1230.32 828.74,1230.32 966.54,1368.11 C43.1@996.06,1368.11 ; L1.1@704.72,1250 818.9,1250 956.69,1387.8 C43.1@972.44,1387.8 ; pad.0@820.87,1238.19 826.77,1244.09 836.61,1244.09 964.57,1372.05 C43.1@986.22,1372.05 ; C43.1@1005.91,1368.11 1005.91,1358.27 1098.43,1265.75 U3.3@1141.73,1265.75 ; C43.1@1023.62,1356.3 1045.28,1334.65 1053.15,1334.65 1080.71,1362.2 ; C43.1@1029.53,1352.36 U3.1@1122.05,1352.36 ; C43.1@1037.4,1366.14 1118.11,1366.14 ; C43.1@1041.34,1391.73 1084.65,1391.73 1196.85,1503.94 1375.98,1503.94 1405.51,1533.46 1405.51,1574.8 1421.26,1590.55 v1@1519.68,1590.55 ; 1047.24,1324.8 C43.1@1047.24,1374.02 ; C43.1@1051.18,1360.24 1122.05,1360.24 ; C43.1@1051.18,1377.95 1122.05,1377.95 ; 1057.09,1312.99 C43.1@1057.09,1366.14 ; C43.1@1061.02,1383.86 1118.11,1383.86 ; 1066.93,1354.33 1066.93,1360.24 ; 1088.58,1387.8 C9.1@1125.98,1387.8 ; 1094.49,1391.73 1100.39,1391.73 1127.95,1419.29 1135.83,1419.29 ; 1116.14,1403.54 1116.14,1389.76 1127.95,1401.57 1127.95,1427.17 ; U3.1@1124.02,1350.39 1124.02,1419.29 ; U3.1@1133.86,1346.46 1133.86,1429.13 1194.88,1490.16 1202.76,1490.16 ; U3.1@1143.7,1354.33 1143.7,1427.17 1192.91,1476.38 1381.89,1476.38 1446.85,1541.34 1519.68,1541.34 1523.62,1545.28 v1@1523.62,1588.58 ; 1183.07,1486.22 1377.95,1486.22 1407.48,1515.75 1407.48,1517.72 ; 1196.85,1496.06 1379.92,1496.06 D2.2@1425.2,1541.34 ; 1379.92,1482.28 1448.82,1551.18 ; 1417.32,1517.72 D2.2@1417.32,1572.83 ; 1419.29,1517.72 D2.2@1419.29,1574.8 ; 1421.26,1582.68 1507.87,1582.68 ; D2.2@1423.23,1551.18 v1@1515.75,1551.18 ; D2.2@1435.04,1564.96 v1@1521.65,1564.96 ; D2.2@1435.04,1574.8 v1@1517.72,1574.8 ; R30.2@1942.91,348.43 1996.06,348.43 v1@2035.43,309.06 ; 2082.68,1470.47 C44.1@2153.54,1470.47 ; 2084.65,1531.5 2342.52,1531.5 ; 2084.65,1551.18 D5.2@2309.06,1551.18 ; 2086.61,1442.91 2086.61,1466.54 ; 2086.61,1480.32 C1.2@2289.37,1480.32 ; 2086.61,1494.09 C1.2@2295.28,1494.09 ; 2088.58,1521.65 2326.77,1521.65 ; 2088.58,1541.34 D5.2@2322.83,1541.34 ; 2090.55,1488.19 C1.2@2295.28,1488.19 ; 2090.55,1503.94 2311.02,1503.94 ; 2090.55,1513.78 2318.9,1513.78 ; 2096.46,1448.82 2096.46,1458.66 ; 2096.46,1456.69 2096.46,1468.5 ; 2102.36,1460.63 2102.36,1472.44 ; C44.1@2177.17,1464.57 2112.2,1464.57 2092.52,1444.88 2092.52,1328.74 2088.58,1324.8 2084.65,1324.8 2082.68,1326.77 2082.68,1553.15 2090.55,1561.02 2346.46,1561.02 2350.39,1557.09 2350.39,1535.43 2305.12,1490.16 C1.2@2305.12,1484.25 ; C44.1@2204.72,1468.5 C1.2@2291.34,1468.5 ; C1.2@2291.34,1480.32 2291.34,1413.39 v1@2297.24,1407.48 ; v1@2297.24,1393.7 C1.2@2297.24,1480.32 ; 2299.21,1348.43 2301.18,1348.43 ; 2301.18,1549.21 2301.18,1346.46 2311.02,1336.61 U2.3@2336.61,1336.61 ; 2303.15,1411.42 U2.1@2318.9,1411.42 ; v1@2305.12,1419.29 U2.1@2320.87,1419.29
  MidLayer2 w5.91: v1@1518.7,1550.19 1521.51,1550.51 1521.94,1550.55 1522.75,1550.64 v1@1523.13,1550.69 ; v1@1522.78,1550.34 v1@1523.13,1550.69 ; v1(2177.17,1555.12) 1527.56,1555.12 v1@1523.13,1550.69
  MidLayer2 w11.81: v1@1515.75,1543.31 v1@1515.75,1586.61 ; v1@1519.68,1570.87 2183.07,1570.87 ; v1@1521.65,1584.65 2181.1,1584.65 ; v1@1523.62,1562.99 v1@2183.07,1562.99 ; v1@1525.59,1549.21 2147.64,1549.21 2155.51,1541.34 2185.04,1541.34 2188.98,1545.28 2188.98,1586.61 2185.04,1590.55 v1@1525.59,1590.55 ; 1527.56,1576.77 2185.04,1576.77 ; v1@2153.54,1551.18 v1@2179.13,1551.18
  Bottom w5.91: J1.2@148,50 192.49,94.49 399.61,94.49 415.35,110.24 415.35,295.28 v1(435.04,314.96) 458.66,291.34 553.15,291.34 567.91,306.1 615.16,306.1 ; 613.19,304.13 615.16,306.1 ; J6.1@1034,1457.03 1080.37,1457.03 1151.57,1385.83 1253.94,1385.83 1273.62,1405.51 1273.62,1456.69 1277.56,1460.63 1340.4,1460.63 J8.1@1344,1457.03 ; J10.1@1647.82,899.61 1874.02,899.61 1909.62,864 ; 1681.43,302.82 1700.79,283.46 1883.86,283.46 1915.35,314.96 2041,314.96 v1@2044.94,311.02 ; 1681.43,303.15 1574.8,303.15 1501.97,375.98 1393.7,375.98 1369.65,400.03 J7.1@1340,400.03 1337.47,402.56 1267.71,402.56 1038.53,402.56 J4.1@1036,400.03 709.09,400.03 615.16,306.1 ; 1916.34,315.94 1916.34,857.28 1909.62,864 ; v1(2037.4,311.02) v1@2044.94,311.02 ; v1@2043.31,309.06 2049.54,302.82 2053.15,302.82 ; U14.A1@2076,864 U14.A2@2032,864 U14.A3@1988.69,864 ; v1@2086.61,1387.8 2086.61,1228.35 1935.04,1076.77 1935.04,1017.72 1988.69,964.06 U14.A3@1988.69,864 ; J13.1@2236,1448.64 2302.97,1448.64 v1(2302.79,1448.82) ; J14.1@2540,262.21 2316.53,262.21 2275.92,302.82 J12.1@2236,302.82 2053.15,302.82 ; 1909.62,864 U14.A3@1988.69,864 ; v1@2044.94,311.02 2053.15,302.82
  Bottom w9.84: J6.1@1051.18,1450.79 1082.68,1450.79 ; J6.1@1053.15,1446.85 1116.14,1446.85 1165.35,1397.64 1228.35,1397.64 1250,1419.29 1250,1454.72 1259.84,1464.57 J8.1@1314.96,1464.57 ; J6.1@1053.15,1464.57 1080.71,1464.57 1157.48,1387.8 1257.87,1387.8 1271.65,1401.57 1271.65,1433.07 1287.4,1448.82 J8.1@1314.96,1448.82 ; J6.1@1064.96,1452.76 1080.71,1452.76 1145.67,1387.8 1190.94,1387.8 ; 1114.17,1442.91 1169.29,1387.8 ; 1139.76,1393.7 1151.57,1381.89 1251.97,1381.89 1265.75,1395.67 1265.75,1401.57 ; 1204.72,1389.76 1240.16,1389.76 1265.75,1415.35 1265.75,1448.82 1271.65,1454.72 J8.1@1316.93,1454.72 ; 1234.25,1389.76 1248.03,1403.54 v1@1248.03,1405.51 ; 1257.87,1389.76 1257.87,1454.72 1263.78,1460.63 1267.72,1460.63 ; 1265.75,1403.54 1265.75,1423.23 ; 1279.53,1444.88 1279.53,1452.76
  Bottom w11.81: J1.2@139.76,57.09 175.2,92.52 383.86,92.52 ; J1.2@155.51,64.96 179.13,88.58 179.13,90.55 ; J1.2@161.42,55.12 198.82,92.52 401.57,92.52 415.35,106.3 415.35,277.56 427.17,289.37 561.02,289.37 574.8,303.15 625.98,303.15 716.54,393.7 J4.1@1005.91,393.7 ; 415.35,275.59 415.35,309.06 427.17,320.87 438.98,320.87 440.94,320.87 468.5,293.31 ; 421.26,289.37 421.26,311.02 ; 421.26,299.21 456.69,299.21 ; 431.1,301.18 v1@431.1,316.93 ; 440.94,295.28 557.09,295.28 ; 452.76,301.18 566.93,301.18 ; 533.46,297.24 545.28,297.24 562.99,314.96 635.83,314.96 ; 564.96,311.02 616.14,311.02 ; 582.68,311.02 610.24,311.02 698.82,399.61 J4.1@1021.65,399.61 ; 618.11,318.9 645.67,346.46 655.51,346.46 702.76,393.7 706.69,393.7 ; 624.02,314.96 667.41,358.36 ; 698.82,383.86 996.06,383.86 J4.1@1015.75,403.54 ; 883.86,395.67 897.64,395.67 911.42,409.45 J4.1@1025.59,409.45 ; J4.1@1047.24,397.64 J7.1@1318.9,397.64 ; J4.1@1059.06,407.48 J7.1@1320.87,407.48 ; J7.1@1352.36,405.51 1366.14,405.51 1393.7,377.95 1503.94,377.95 1570.87,311.02 J9.1@1625.98,311.02 ; J7.1@1358.27,397.64 1364.17,397.64 1385.83,375.98 1505.91,375.98 1525.59,356.3 ; 1431.1,377.95 1500,377.95 1576.77,301.18 1604.33,301.18 ; 1580.71,301.18 J9.1@1622.05,301.18 ; J10.1@1659.45,905.51 1864.17,905.51 1899.61,870.08 U14.A3@1980.32,870.08 ; J9.1@1661.42,309.06 1681.1,309.06 1704.72,285.43 1881.89,285.43 1923.23,326.77 ; J10.1@1665.35,909.45 1877.95,909.45 1907.48,879.92 U14.A3@1982.28,879.92 ; J9.1@1673.23,303.15 1694.88,281.5 1887.8,281.5 1923.23,316.93 1927.17,316.93 ; 1858.27,903.54 1905.51,856.3 U14.A3@1986.22,856.3 ; 1868.11,905.51 1874.02,905.51 1915.35,864.17 1917.32,864.17 ; 1911.42,870.08 U14.A1@2072.83,870.08 ; 1919.29,312.99 v1@2041.34,312.99 ; 1923.23,318.9 2041.34,318.9 2051.18,309.06 J12.1@2216.54,309.06 ; 1925.2,322.83 1925.2,860.24 ; U14.A3@1982.28,872.05 1982.28,962.6 1925.2,1019.68 1925.2,1080.71 2078.74,1234.25 v1@2078.74,1405.51 ; U14.A3@1996.06,868.11 1996.06,966.54 1937.01,1025.59 1937.01,1076.77 2088.58,1228.35 v1@2088.58,1407.48 ; v1@2035.43,309.06 2043.31,301.18 J12.1@2214.57,301.18 ; v1@2098.43,1553.15 v1@2177.17,1553.15 ; v1@2100.39,1559.06 v1@2177.17,1559.06 ; v1@2131.89,1557.09 2167.32,1557.09 J13.1@2267.72,1456.69 ; v1@2153.54,1559.06 2259.84,1452.76 J13.1@2259.84,1450.79 ; J12.1@2240.16,311.02 2277.56,311.02 2328.74,259.84 J14.1@2535.43,259.84 ; J13.1@2255.91,1456.69 v1@2299.21,1456.69 ; J12.1@2257.87,301.18 2271.65,301.18 2318.9,253.94 J14.1@2525.59,253.94 ; J13.1@2259.84,1442.91 v1@2299.21,1442.91 ; v1@2297.24,1395.67 v1@2297.24,1448.82 ; v1@2299.21,1399.61 v1@2299.21,1450.79 ; v1@2305.12,1397.64 v1@2305.12,1450.79
  other v1: 2086.61,1330.71 2086.61,1356.3 2086.61,1381.89 1246.06,1385.83 2301.18,1397.64 2086.61,1405.51 1246.06,1409.45 2301.18,1423.23 1519.68,1545.27 2100.39,1555.12 2125.98,1555.12 2151.57,1555.12 1519.69,1564.96 1519.68,1586.61
VDD_5V_PERIPH: 
VDD_5V_SENS: R30.1 R32.1 U4.29 | length 319.2
  Top w5.91: U4.29@1826.37,478.01 1826.37,477.08 1887.11,416.34 1888.04,416.34 1894.07,410.31 R30.1@1894.07,390.86 R32.1@1934.5,431.29
  Top w9.84: U4.29@1838.58,464.57 1877.95,425.2 1877.95,419.29 R30.1@1897.64,399.61
  Top w11.81: R30.1@1897.64,389.76 1935.04,427.17 R32.1@1935.04,431.1
VDD_SERVO: F1.2 J1.5 J1.8 J1.11 J1.14 J1.17 J1.20 J1.23 J1.26 J1.29 J1.32 J1.35 J1.38 J1.41 J1.44 J1.47 pad.0@415.35,1299.21 | length 6807.2
  Top w5.91: J1.5@148,150 J1.8@148,250 J1.11@148,350 J1.14@148,450 J1.17@148,550 J1.20@148,650 J1.23@148,750 J1.26@148,850 J1.29@148,950 J1.32@148,1050 J1.35@148,1150 J1.38@148,1250 148,1301.18 ; J1.47@148,1550 J1.44@148,1450 J1.41@148,1350 148,1301.18 ; 149.97,1401.57 440.98,1401.57 F1.2@467.91,1374.65 467.91,1373.72 467.91,1339.96 429.13,1301.18 148,1301.18
  Top w11.81: J1.47@116.14,1539.37 116.14,129.92 125.98,120.08 175.2,120.08 177.17,122.05 J1.47@177.17,1553.15 ; 147.64,1399.61 458.66,1399.61 F1.2@464.57,1393.7 ; 149.61,1297.24 429.13,1297.24 480.32,1348.43 F1.2@480.32,1374.02 ; 149.61,1403.54 480.32,1403.54 ; 151.57,1397.64 F1.2@454.72,1397.64 ; 153.54,1305.12 419.29,1305.12 F1.2@466.54,1352.36 ; pad.0@413.39,1293.31 417.32,1293.31 464.57,1340.55 464.57,1344.49 ; 448.82,1328.74 F1.2@448.82,1391.73
VDD_SERVO_IN: 
VDD_SERVO_SENS: R42.1 R43.2 U6.14 | length 554.3
  Top w5.91: R43.2@539.34,349.1 R42.1@539.34,408.75 540.64,408.75 637.8,505.91 637.8,523.93 U6.14@689.18,575.32
  Top w11.81: R43.2@543.31,350.39 543.31,409.45 637.8,503.94 637.8,521.65 669.29,553.15 669.29,555.12 U6.14@675.2,561.02
pads on no net: JX1.7 JX1.8 JX1.10 JX3.7 JX3.8 JX3.10 K1.1 K1.2 K2.1 K2.2 M1.P$1 M2.P$1 M3.P$1 M4.P$1 U4.16 U6.3 U6.4 U6.25 U6.32 U6.42 U6.43 U7.4 U10.2 U10.3 U10.4 U10.5 U10.6 U10.7 U10.11 U10.14 U10.15 U10.16 U10.17 U10.19 U10.21 U10.22 U13.7 USB1.ID

## Polygon pours and split planes (outlines as drawn)
GND on Top "Top-GND" (hatched 90Degree grid 11.81 track 11.81, pour order 0): 33.46,1580.71 2718.5,1580.71 cw(c2718.5,1557.09) 2742.13,1557.09 2742.13,35.43 cw(c2722.44,35.43) 2722.44,15.75 35.43,15.75 cw(c35.43,43.31) 7.87,43.31 7.87,1564.96 41.34,1564.96
GND on MidLayer1 "MidLayer1-GND" (hatched 90Degree grid 11.81 track 11.81, pour order 1): 37.4,1584.65 2726.38,1584.65 cw(c2726.38,1566.93) 2744.09,1566.93 2744.09,39.37 cw(c2722.44,39.37) 2722.44,17.72 27.56,17.72 27.56,59.06 ccw(c27.56,41.34) 9.84,41.34 9.84,1562.99 cw(c31.5,1562.99) 31.5,1584.65
GND on MidLayer2 "MidLayer2-GND" (hatched 90Degree grid 11.81 track 11.81, pour order 2): 33.46,1588.58 2712.6,1588.58 cw(c2712.6,1559.06) 2742.13,1559.06 2742.13,33.46 cw(c2724.41,33.46) 2724.41,15.75 35.43,15.75 cw(c35.43,41.34) 9.84,41.34 9.84,1566.93 cw(c31.5,1566.93) 31.5,1588.58
GND on Bottom "Bottom-GND" (hatched 90Degree grid 11.81 track 11.81, pour order 3): 33.46,1584.65 2714.57,1584.65 cw(c2714.57,1557.09) 2742.13,1557.09 2742.13,35.43 cw(c2722.44,35.43) 2722.44,15.75 31.5,15.75 cw(c31.5,37.4) 9.84,37.4 9.84,1561.02 cw(c33.46,1561.02) 33.46,1584.65

## Keep-outs
Keep-Out Layer:
  lines w0: 0,33 ccw(c28,33) 28,5 934,5 cw(c965.5,5.5) 965,37 1044,37 cw(c1043.5,5.5) 1075,5 2729,5 ccw(c2728.5,32.5) 2756,33 2756,1572 ccw(c2728.5,1572.5) 2729,1600 1079,1600 cw(c1047.5,1599.5) 1048,1568 969,1568 cw(c969,1600) 937,1600 28,1600 ccw(c28,1572) 0,1572 0,33

## Other copper
Top:
  rectangle net VDD_SERVO: 116.14,127.95 173.23,1547.24
  rectangle net VDD_5V_IN: 112.2,15.75 181.1,78.74

## Silkscreen, mask and mechanical layers (free items; w line width, h text height)
Top Overlay:
  circle w7.87: c2669.29,992.13 r32.29
  circle w7.87: c2383.86,714.57 r32.29
  circle w7.87: c2580.71,39.37 r32.29
  circle w7.87: c2403.54,1265.75 r32.29
  circle w7.87: c415.35,1299.21 r32.29
  circle w7.87: c818.9,1244.09 r32.29
  circle w7.87: c1974.41,1568.9 r32.29
  lines w20: 2442.76,986.87 2570.76,1002.87 ; 2442.76,1018.87 2538.76,1002.87 ; 2490.76,1002.87 2426.76,1002.87 ; 2426.76,1002.87 2426.76,1034.87 2650.76,1002.87 2426.76,970.87 2426.76,1002.87
  text "PX4FMU v2.4.8" at 1456.02,1341.33 h31.5
Bottom Overlay:
  circle w12: c1941,1110 r26
  circle w10: c650,94 r60
  circle w10: c489,94 r60
  circle w10: c327,94 r60
  circle w10: c327,1511 r60
  circle w10: c489,1511 r60
  lines w10: 1900,714 ccw(c1939,714) 1939,675 2126,675 ccw(c2126.5,714.5) 2166,714 2166,901 ccw(c2126,901) 2126,941 1939,941 ccw(c1939.5,901.5) 1900,901 1900,714
  lines w12: 1941,1140 1941,1208 ; 1969,1110 2050,1110 ; 2050,1110 2030,1130 2030,1090 2050,1110 ; 1921,1200 1961,1200 1941,1220 1921,1200
  lines w16: 1924,1093 1956,1125 ; 1924,1125 1956,1093
  text "USB" at 1555.28,1300.27 h39.37 r270
  text "SPI" at 2141.89,1270.74 h39.37 r270
  text "FMU PWR" at 318.51,1254.99 h25.5 r270
  text "FMU B/E" at 478.51,1254.99 h25.5 r270
  text "TELEM2" at 935.2,1247.12 h39.37 r270
  text "TELEM1" at 1254.1,1237.28 h39.37 r270
  text "POWER" at 2439.14,1217.59 h39.37 r270
  text "Y" at 1909,1180 h11.81
  text "Z" at 1883,1075 h11.81
  text "X" at 2089,1040 h11.81
  text "SWITCH" at 947.01,697.91 h39.37 r270
  text "ADC3.3V" at 1842.68,664.44 h39.37 r270
  text "BUZZER" at 884.02,506.96 h39.37 r270
  text "PX4FMU v2.4.8" at 2077.45,485.03 h31.5
  text "GPS" at 1236.38,219.56 h39.37 r270
  text "IO PWR" at 318.51,188.73 h25.5 r270
  text "IO B/E" at 478.51,188.73 h25.5 r270
  text "IO ACT" at 638.51,187.73 h25.5 r270
  text "CAN" at 1549.37,182.16 h39.37 r270
  text "I2C" at 2135.99,174.28 h39.37 r270
  text "SERIAL 4/5" at 947.01,93.57 h39.37 r270
  text "ADC6.6V" at 2448.98,83.73 h39.37 r270
Dimension:
  lines w0: 0,33 ccw(c28,33) 28,5 934,5 cw(c965.5,5.5) 965,37 1044,37 cw(c1043.5,5.5) 1075,5 2729,5 ccw(c2728.5,32.5) 2756,33 2756,1572 ccw(c2728.5,1572.5) 2729,1600 1079,1600 cw(c1047.5,1599.5) 1048,1568 969,1568 cw(c969,1600) 937,1600 28,1600 ccw(c28,1572) 0,1572 0,33

## Text inside footprints (layer, text, board x,y; h text height)
U10: Top Overlay "X" at 2512.57,849.04 h11.81 r90; Top Overlay "Y" at 2572.01,904.41 h11.81 r90; Top Overlay "Z" at 2504.7,908.35 h11.81 r90
U15: tDocu "card OUT" at 2905,693.82 h11.81 r270; tDocu "card IN" at 2756,717.44 h11.81 r270